# Altium PCB PCB1.PcbDoc
Units mil, origin at the board's own origin, x right, y up, seen from the top; angles counter-clockwise.
Board outline 6000 x 3345 mil, 4 copper layers (Top Layer, Ground, Power, Bottom Layer), stack 37.712 mil thick; 73 components, 69 nets, 250 pads, 116 vias.
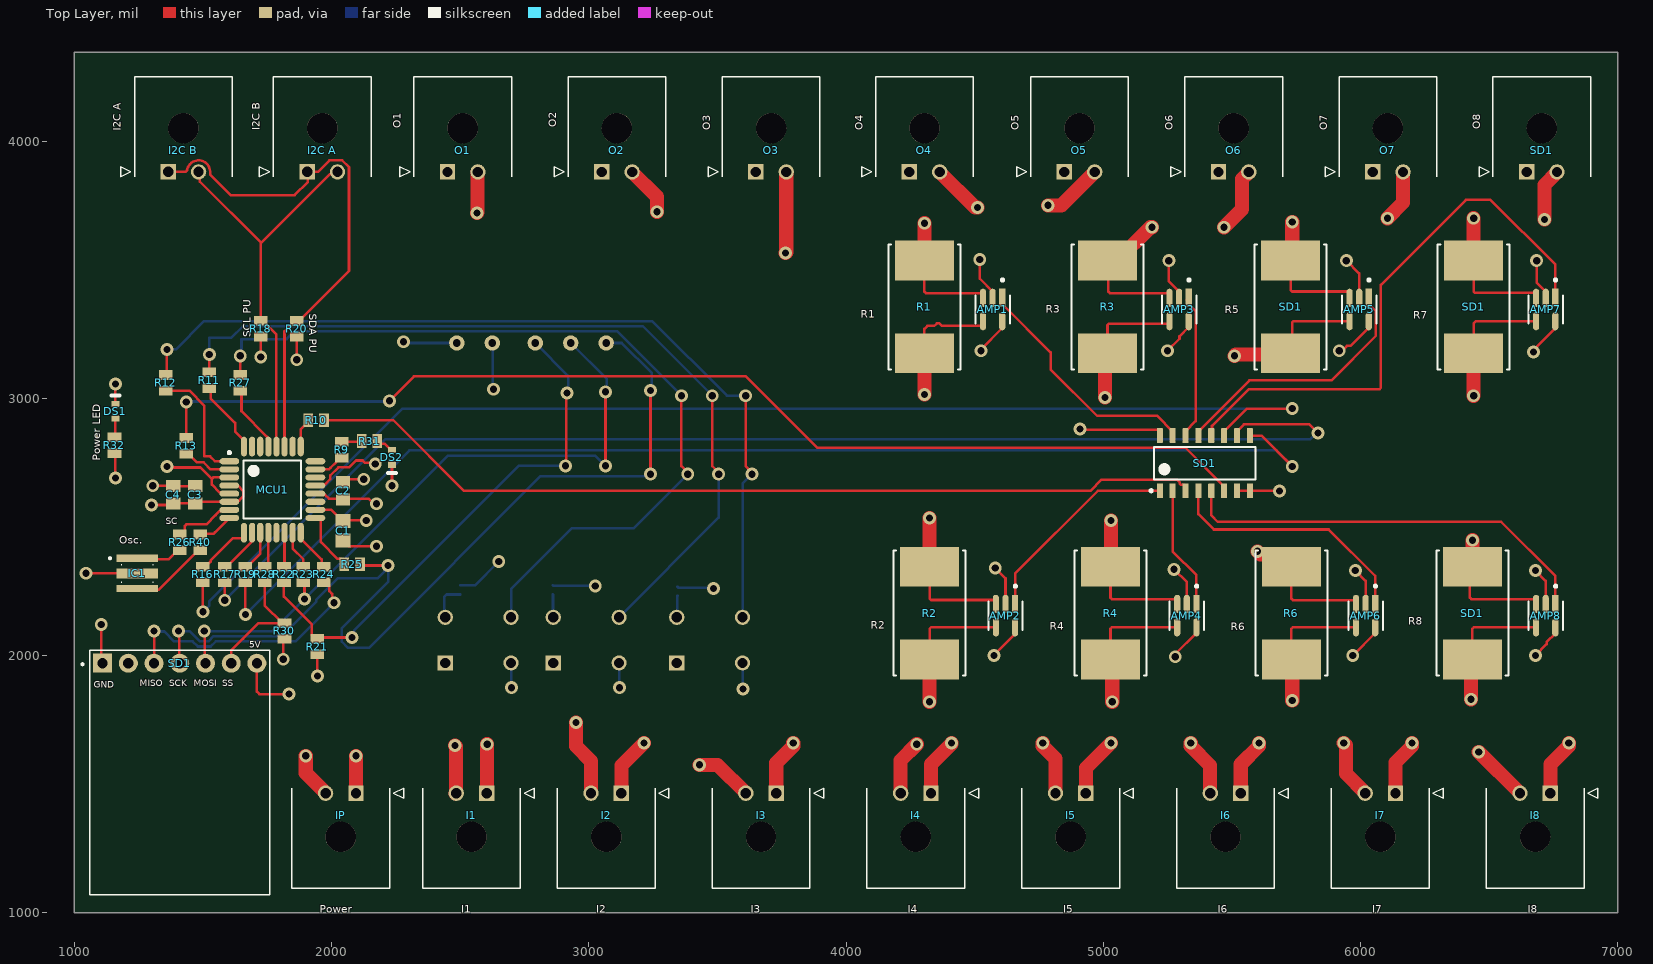
[diagram p0: Top Layer view]
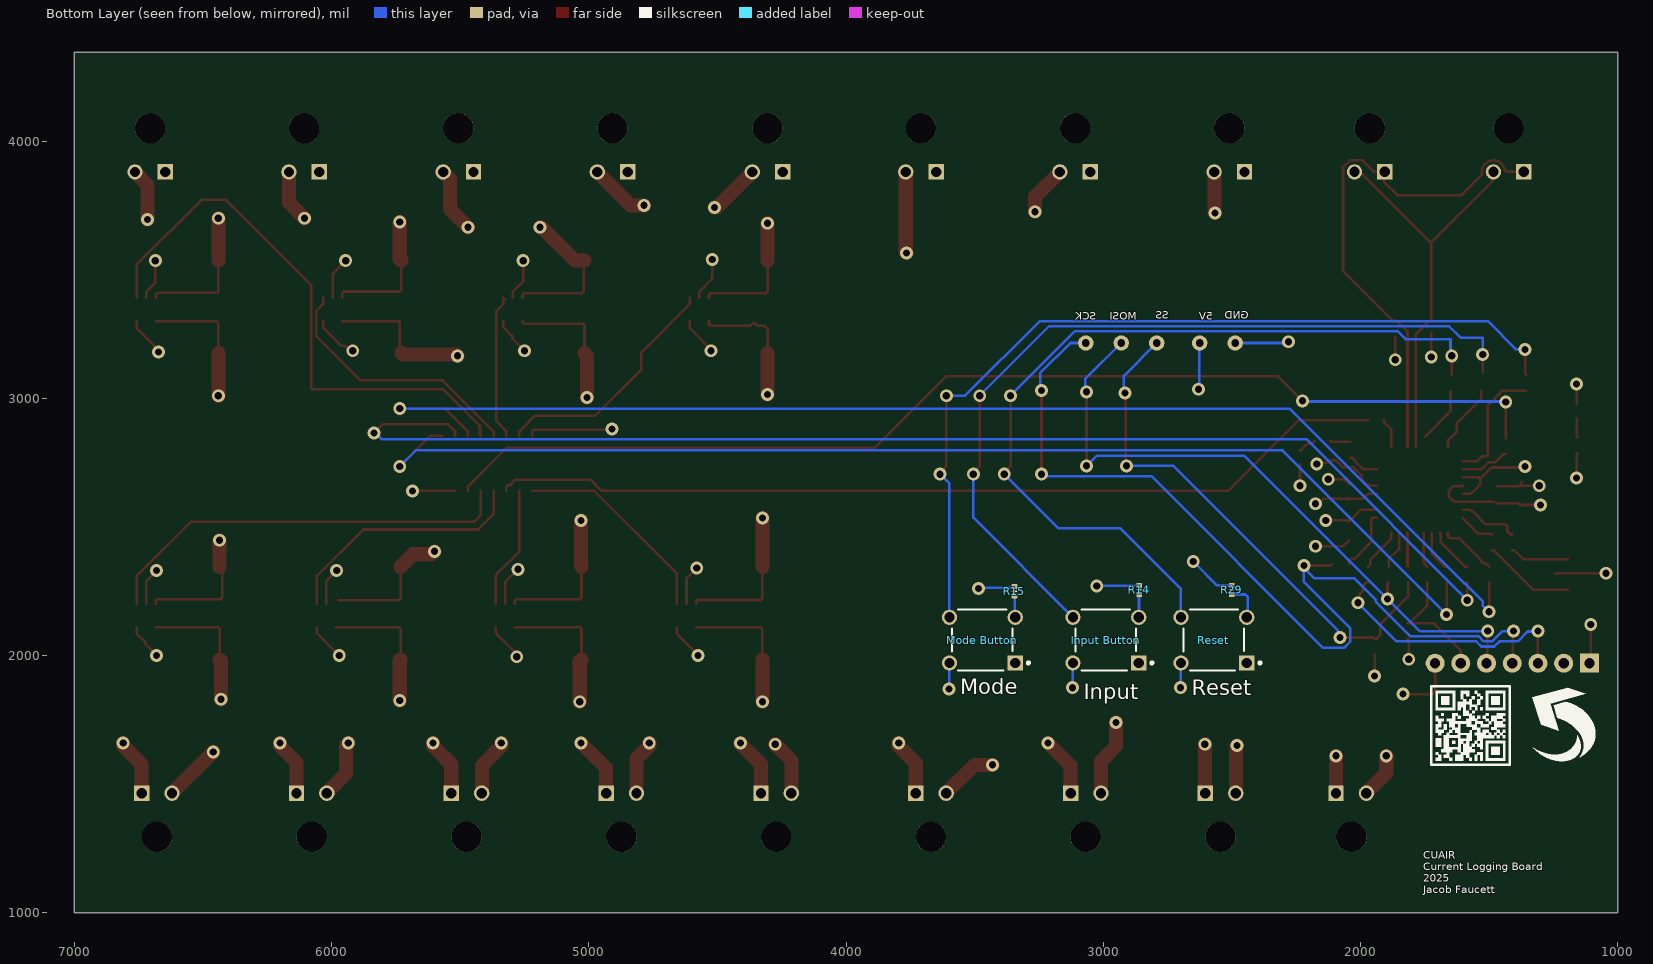
[diagram p1: Bottom Layer view, seen from below]
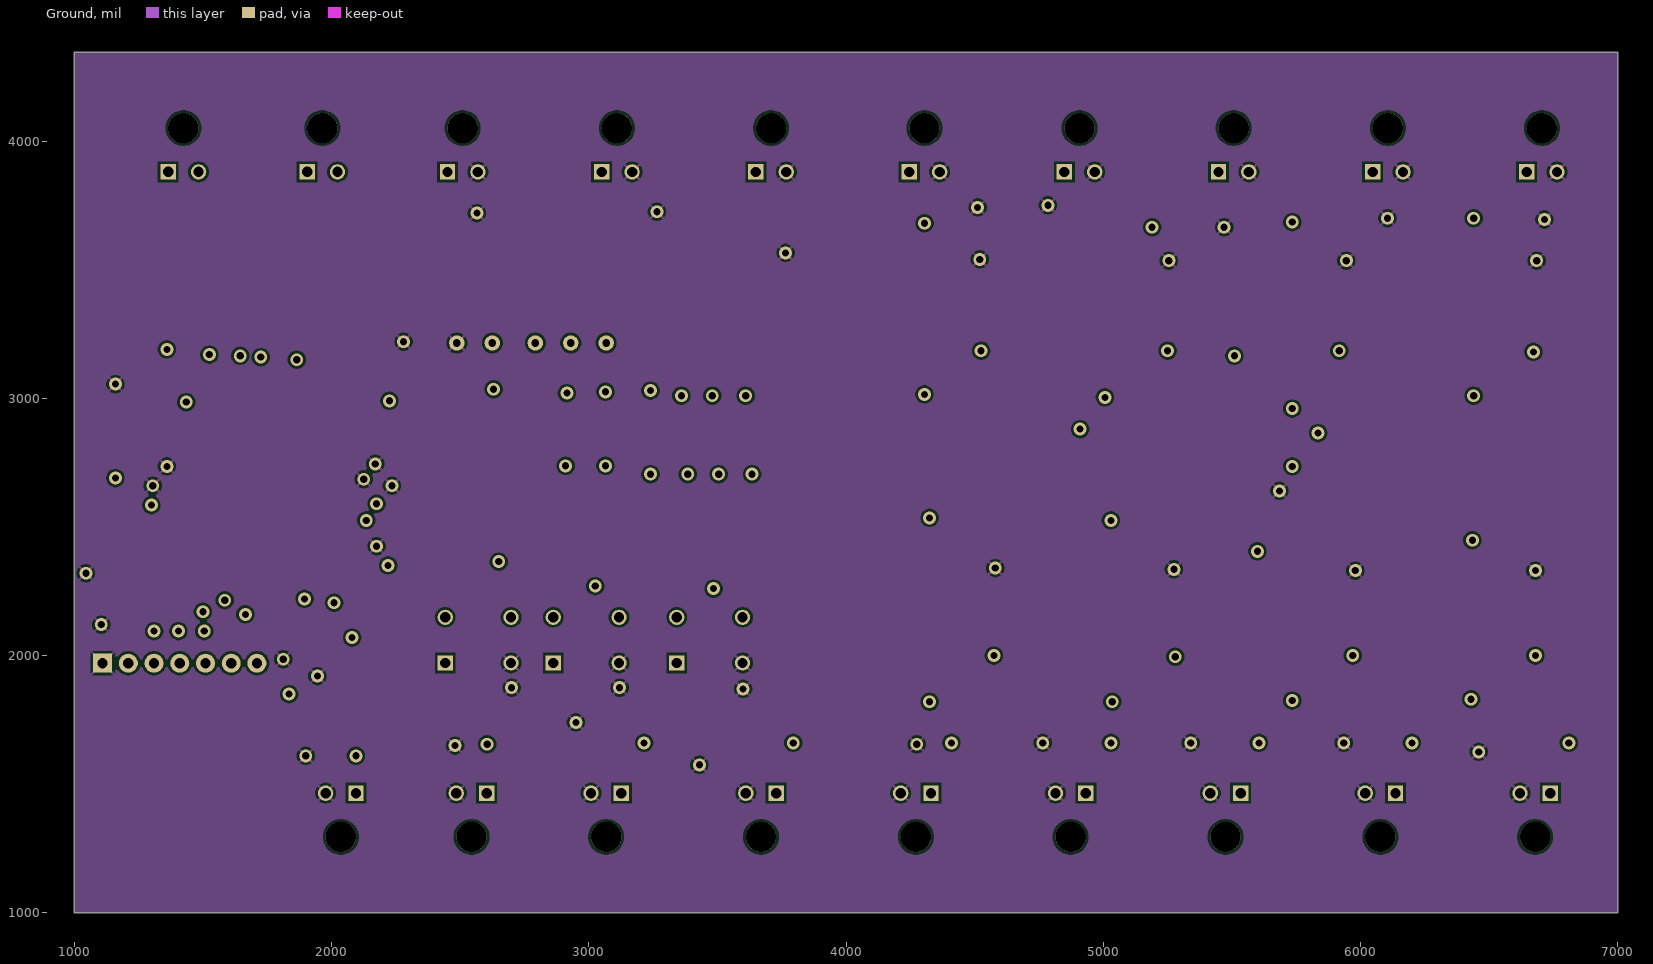
[diagram p2: Ground]
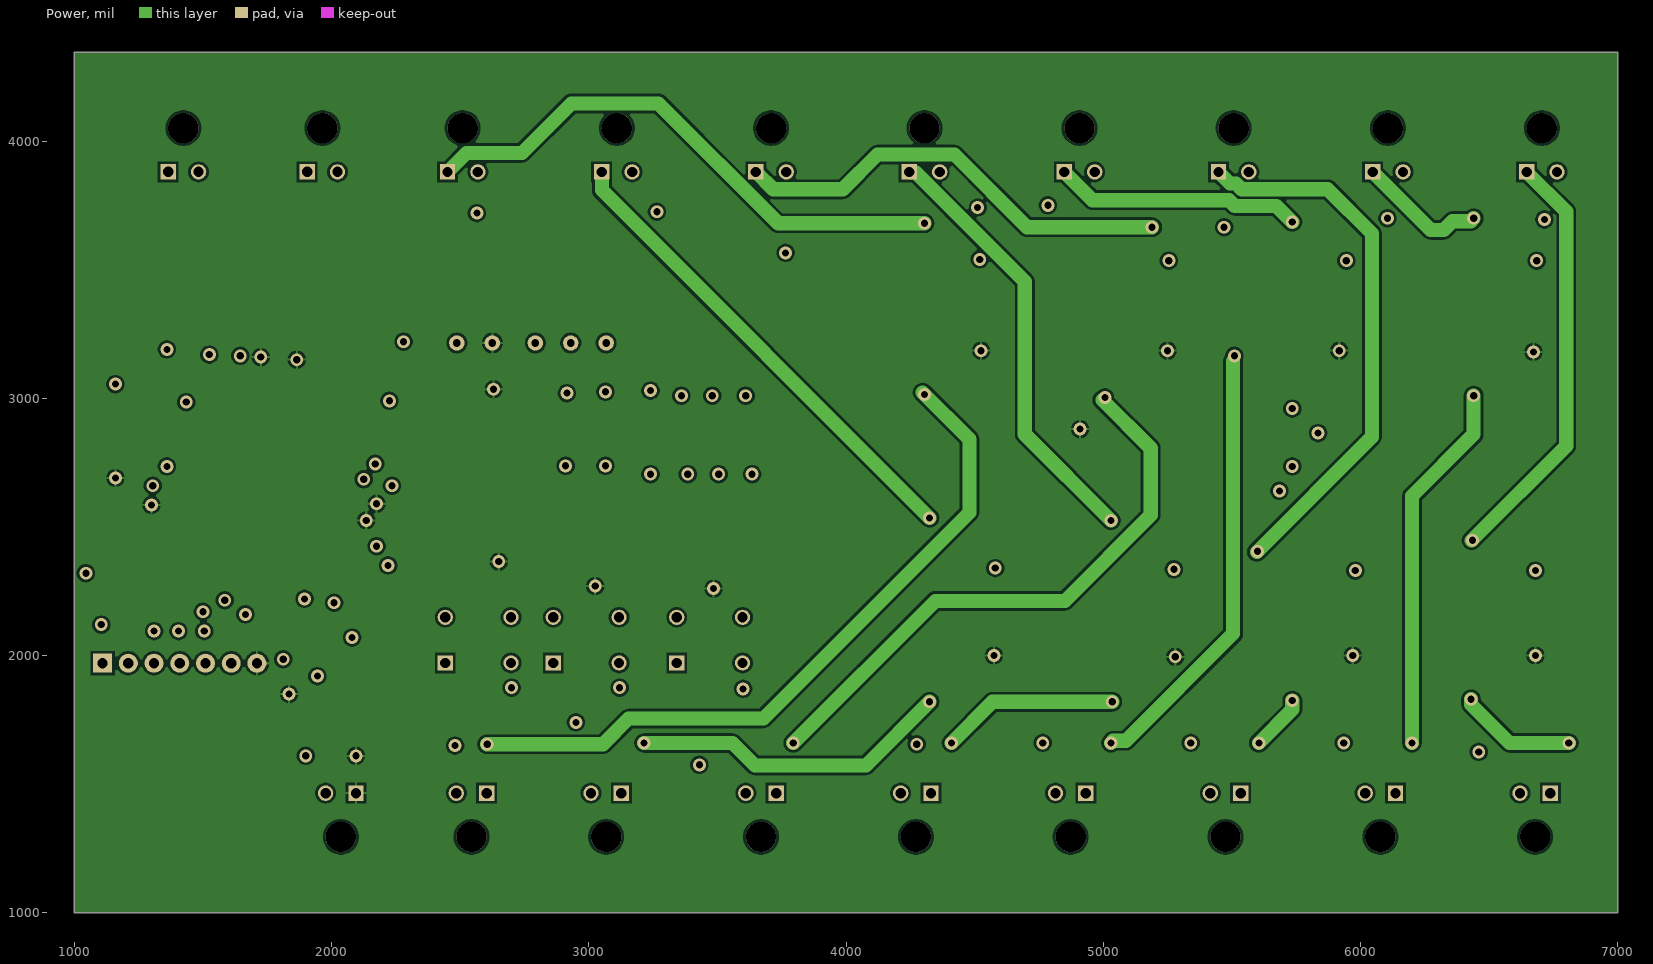
[diagram p3: Power]
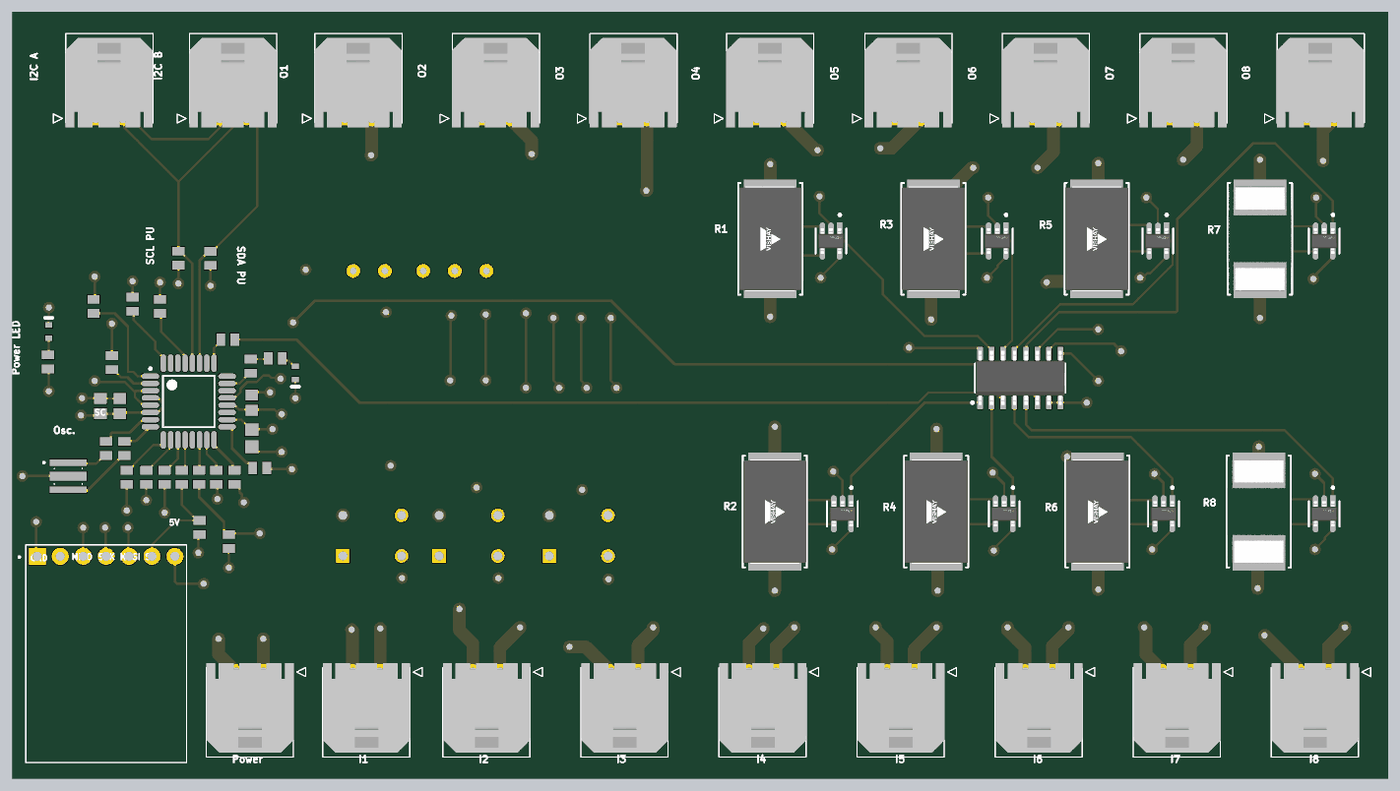
[diagram p4: 3D render of the assembled board from above, using the file's embedded part models]
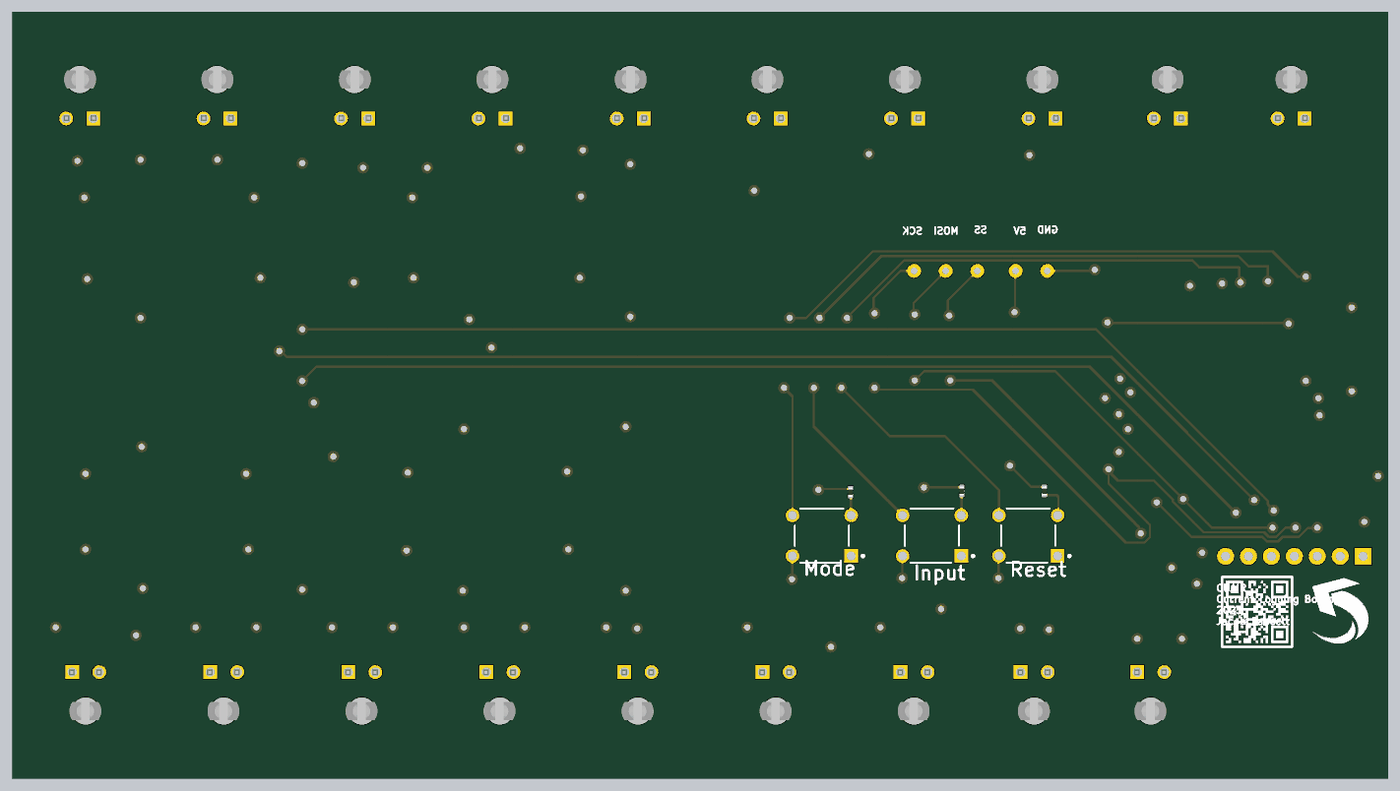
[diagram p5: 3D render of the assembled board from below, using the file's embedded part models]

## Layer stack, top to bottom
Top Solder: solder mask 0.4, Solder Resist, Dk 3.5
Top Layer: signal copper 1.4
Dielectric 6: prepreg 2.8, PP-006, Dk 4.1
Ground: signal copper 2.7559
Dielectric 2: prepreg 2.8, PP-006, Dk 4.1
Dielectric 3: prepreg 2.8, PP-006, Dk 4.1
Dielectric 1: dielectric 12.6, FR-4, Dk 4.8
Dielectric 4: prepreg 2.8, PP-006, Dk 4.1
Dielectric 5: prepreg 2.8, PP-006, Dk 4.1
Power: signal copper 2.7559
Dielectric 7: prepreg 2.8, PP-006, Dk 4.1
Bottom Layer: signal copper 1.4
Bottom Solder: solder mask 0.4, Solder Resist, Dk 3.5

## Board outline
1000,1000 7000,1000 7000,4345 1000,4345

## Design rules (kind name [scope] priority, off if disabled: settings)
Clearance [All] p1: gap=10 ignorepadtopadclearanceinfootprint=FALSE except(5: SMDPad-SMDPad THPad-THPad)
HoleSize [All] p1: absolutevalues=TRUE maxlimit=200 minlimit=1 maxpercent=80.000 minpercent=20.000
MatchedLengths OP8_Match [InxSignalClass('All xSignals')] p1: tolerance=1000 checknetsindiffpair=FALSE checkdiffpairvsdiffpair=TRUE checkxsignals=TRUE checkothers=TRUE targetsourcename=OP8_xSignal
MatchedLengths OP7_Match [InxSignalClass('All xSignals')] p2: tolerance=1000 checknetsindiffpair=FALSE checkdiffpairvsdiffpair=TRUE checkxsignals=TRUE checkothers=TRUE targetsourcename=OP7_xSignal
MatchedLengths OP6_Match [InxSignalClass('All xSignals')] p3: tolerance=1000 checknetsindiffpair=FALSE checkdiffpairvsdiffpair=TRUE checkxsignals=TRUE checkothers=TRUE targetsourcename=OP6_xSignal
MatchedLengths OP5_Match [InxSignalClass('All xSignals')] p4: tolerance=1000 checknetsindiffpair=FALSE checkdiffpairvsdiffpair=TRUE checkxsignals=TRUE checkothers=TRUE targetsourcename=OP5_xSignal
MatchedLengths OP4_Match [InxSignalClass('All xSignals')] p5: tolerance=1000 checknetsindiffpair=FALSE checkdiffpairvsdiffpair=TRUE checkxsignals=TRUE checkothers=TRUE targetsourcename=OP4_xSignal
MatchedLengths OP3_Match [InxSignalClass('All xSignals')] p6: tolerance=1000 checknetsindiffpair=FALSE checkdiffpairvsdiffpair=TRUE checkxsignals=TRUE checkothers=TRUE targetsourcename=OP3_xSignal
MatchedLengths OP2_Match [InxSignalClass('All xSignals')] p7: tolerance=1000 checknetsindiffpair=FALSE checkdiffpairvsdiffpair=TRUE checkxsignals=TRUE checkothers=TRUE targetsourcename=OP2_xSignal
MatchedLengths OP1_Match [InxSignalClass('All xSignals')] p8: tolerance=1000 checknetsindiffpair=FALSE checkdiffpairvsdiffpair=TRUE checkxsignals=TRUE checkothers=TRUE targetsourcename=OP1_xSignal
MinimumSolderMaskSliver [All] p1: minsoldermaskwidth=5
PolygonConnect PowerPolygonConnect [InNetClass('Power Class')] p1: connectstyle=Relief reliefconductorwidth=10 reliefentries=4 polygonreliefangle="90 Angle" airgapwidth=10
PolygonConnect GroundPolygonConnect [InNetClass('Ground Class')] p2: connectstyle=Relief reliefconductorwidth=10 reliefentries=4 polygonreliefangle="45 Angle" airgapwidth=10
PolygonConnect [All] p3: connectstyle=Relief reliefconductorwidth=10 reliefentries=4 polygonreliefangle="90 Angle" airgapwidth=10
RoutingVias [All] p1: holewidth=28 width=50 viastyle="Through Hole" minholewidth=28 minwidth=50 maxholewidth=28 maxwidth=50
SilkToSolderMaskClearance sliver [IsPad] p1: minsilkscreentomaskgap=4 clearancetoexposedcopper=TRUE
SolderMaskExpansion [All] p1: expansion=4 istentingtop=FALSE
SupplyNets "Schematic Supply Nets_4" [InNet('GND')] p1: voltage=0.000
SupplyNets "Schematic Supply Nets_3" [InNet('+5V')] p2: voltage=0.000
SupplyNets "Schematic Supply Nets_2" [InNet('+5')] p3: voltage=0.000
SupplyNets "Schematic Supply Nets_1" [InNet('AGND')] p4: voltage=0.000
SupplyNets "Schematic Supply Nets" [InNet('DGND')] p5: voltage=0.000
Width [All] p1: maxlimit=283 minlimit=10 preferedwidth=140 toplayer_maxwidth=140 toplayer_prefwidth=55 midlayer1_maxwidth=10 midlayer1_prefwidth=10 bottomlayer_maxwidth=140 bottomlayer_prefwidth=55 minimp=50.000000 maximp=50.000000 favimp=50.000000
27 further rules are at their usual default settings.

## Classes and differential pairs
net class "Power Class": +5 +5V
net class "Ground Class": AGND DGND GND
component class test_led: DS1 DS2 R8 R32
component class shunts_and_amplifiers: AMP1 AMP2 AMP3 AMP4 AMP5 AMP6 AMP7 AMP8 R1 R2 R3 R4 R6 SD1
component class SD: SD1
component class mux: SD1
component class mcu: C1 C2 C3 C4 IC1 MCU1 R9 R10 R11 R12 R13 R16 R17 R18 R19 R20 R21 R22 R23 R24 R25 R26 R27 R28 R30 R40
component class headers: I1 I2 "I2C A" "I2C B" I3 I4 I5 I6 I7 I8 IP O1 O2 O3 O4 O5 O6 O7 SD1
component class buttons: "Input Button" "Mode Button" R14 R15 R29 Reset

## Components (designator, comment, footprint, x,y, rotation, side; value= is the part's Value field where it differs from the comment)
AMP1 "INA180A1" FP-DBV0005A-IPC_A 4570,3345.16 r270 top
AMP2 "INA180A1" FP-DBV0005A-IPC_A 4620,2155.16 r270 top
AMP3 "INA180A1" FP-DBV0005A-IPC_A 5295,3345.16 r270 top
AMP4 "INA180A1" FP-DBV0005A-IPC_A 5325,2155.16 r270 top
AMP5 "INA180A1" FP-DBV0005A-IPC_A 5995,3345.16 r270 top
AMP6 "INA180A1" FP-DBV0005A-IPC_A 6020,2155.16 r270 top
AMP7 "INA180A1" FP-DBV0005A-IPC_A 6720,3345.16 r270 top
AMP8 "INA180A1" FP-DBV0005A-IPC_A 6720,2155.16 r270 top
C1 "100nf" CAPC2013X95X45ML10T25 2045,2485 r90 top
C2 "100nf" CAPC2013X95X45NL10T25 2045,2640 r270 top
C3 "100nf" CAPC2013X95X45NL10T25 1470,2625 r270 top
C4 "100nf" CAPC2013X95X45NL10T25 1385,2625 r270 top
DS1 "TLMS1100-GS08" VISH-TLMX1100_V 1160,2950 r90 top
DS2 "TLMS1100-GS08" VISH-TLMX1100_V 2235,2770 r270 top
I1 "43650-0201" 43650-02(00,01,02) 2603.11,1465 r0 top
I2 "43650-0201" 43650-02(00,01,02) 3126.87,1465 r0 top
"I2C A" "43650-0201" 43650-02(00,01,02) 1905,3880 r180 top
"I2C B" "43650-0201" 43650-02(00,01,02) 1365,3880 r180 top
I3 "43650-0201" 43650-02(00,01,02) 3728.75,1465 r0 top
I4 "43650-0201" 43650-02(00,01,02) 4330.62,1465 r0 top
I5 "43650-0201" 43650-02(00,01,02) 4932.49,1465 r0 top
I6 "43650-0201" 43650-02(00,01,02) 5534.36,1465 r0 top
I7 "43650-0201" 43650-02(00,01,02) 6136.24,1465 r0 top
I8 "43650-0201" 43650-02(00,01,02) 6738.11,1465 r0 top
IC1 "AWSCR-16.00CV-T" AWSCR1600CVT 1220.39,2319.06 r270 top
"Input Button" "B3F-1000" OMRON-B3F-1000-4_V 2990,2060 r0 bottom
IP "43650-0201" 43650-02(00,01,02) 2095,1465 r0 top
MCU1 "ATmega328P-AU" 32A_M 1770,2645 r0 top
"Mode Button" "B3F-1000" OMRON-B3F-1000-4_V 3470,2060 r0 bottom
O1 "43650-0201" 43650-02(00,01,02) 2450.94,3879.92 r180 top
O2 "43650-0201" 43650-02(00,01,02) 3050.37,3879.92 r180 top
O3 "43650-0201" 43650-02(00,01,02) 3649.79,3879.92 r180 top
O4 "43650-0201" 43650-02(00,01,02) 4245.94,3879.92 r180 top
O5 "43650-0201" 43650-02(00,01,02) 4848.63,3879.92 r180 top
O6 "43650-0201" 43650-02(00,01,02) 5448.05,3879.92 r180 top
O7 "43650-0201" 43650-02(00,01,02) 6047.47,3879.92 r180 top
R1 ".01 Ohm 4 Terminal" FP-WSR3-MFG 4305,3355 r90 top locked
R2 ".01 Ohm 4 Terminal" FP-WSR3-MFG 4325,2165 r90 top
R3 ".01 Ohm 4 Terminal" FP-WSR3-MFG 5016.67,3355 r90 top
R4 ".01 Ohm 4 Terminal" FP-WSR3-MFG 5028.33,2165 r90 top
R6 ".05 Ohm 4 Terminal" FP-WSR3-MFG 5731.67,2165 r90 top
R9 "0 (Empty Jumper)" 0805 2040,2800 r90 top value=0
R10 "0 (Empty Jumper)" 0805 1940,2915 r0 top value=0
R11 "0 (Empty Jumper)" 0805 1525,3070 r90 top value=0
R12 "0 (Empty Jumper)" 0805 1355,3060 r90 top value=0
R13 "0 (Empty Jumper)" 0805 1435,2815 r90 top value=0
R14 "Resistor 1K +/-5 % 0402 63 mW" RESC0402(1005)_L 2860,2255 r270 bottom value=1k
R15 "Resistor 1K +/-5 % 0402 63 mW" RESC0402(1005)_L 3345,2250 r270 bottom value=1k
R16 "0 (Empty Jumper)" 0805 1500,2315 r270 top value=0
R17 "0 (Empty Jumper)" 0805 1585,2315 r270 top value=0
R18 "10000 (10k)" 0805 1725,3270.51 r270 top value=10k
R19 "0 (Empty Jumper)" 0805 1665,2315 r270 top value=0
R20 "10000 (10k)" 0805 1865,3270 r270 top value=10k
R21 "10000 (10k)" 0805 1945,2035 r90 top value=10k
R22 "0 (Empty Jumper)" 0805 1815,2315 r270 top value=0
R23 "0 (Empty Jumper)" 0805 1890,2315 r270 top value=0
R24 "0 (Empty Jumper)" 0805 1970,2315 r270 top value=0
R25 "0 (Empty Jumper)" 0805 2080,2355 r0 top value=0
R26 "0 (Empty Jumper)" 0805 1410,2440 r270 top value=0
R27 "0 (Empty Jumper)" 0805 1645,3060 r90 top value=0
R28 "0 (Empty Jumper)" 0805 1740,2315 r270 top value=0
R29 "Resistor 1K +/-5 % 0402 63 mW" RESC0402(1005)_L 2500,2255 r270 bottom value=1k
R30 "10000 (10k)" 0805 1817.13,2095.51 r90 top value=10k
R31 "0 (Empty Jumper)" 0805 2147.61,2833.72 r180 top value=0 (schematic designator R9)
R32 "0 (Empty Jumper)" 0805 1156.28,2817.61 r270 top value=0 (schematic designator R9)
R40 "0 (Empty Jumper)" 0805 1490,2440 r90 top value=0
Reset "B3F-1000" OMRON-B3F-1000-4_V 2570,2060 r0 bottom
SD1 "DEV-13743" MODULE_DEV-13743 1410,1545 r180 top locked
SD1 ".1 Ohm 4 Terminal" FP-WSR-MFG 6435,2165 r90 top value=100mΩ (schematic designator R31)
SD1 ".1 Ohm 4 Terminal" FP-WSR-MFG 6440,3355 r90 top value=100mΩ (schematic designator R7)
SD1 ".01 Ohm 4 Terminal" FP-WSR3-MFG 5728.33,3355 r90 top (schematic designator R5)
SD1 "43650-0201" 43650-02(00,01,02) 6645.94,3879.92 r180 top (schematic designator O8)
SD1 "CD4051BM96" D0016A_N 5395,2747.72 r90 top (schematic designator MUX1)

## Footprints (in the part's own frame and the unit in brackets; to place one, negate y for a bottom-side part, rotate by r counter-clockwise, add the part's x,y. Pads: shape width x height; smd on the part's side, far side on the other; paste and mask are expansions set on the pad)
32A_M [mm] "Thin QFP, 32-Leads, Body 7x7mm, Pitch 0.8mm, IPC Low Density"
  oval 1.95x0.6 smd: 1(-4.25,2.8) 2(-4.25,2) 3(-4.25,1.2) 4(-4.25,0.4) 5(-4.25,-0.4) 6(-4.25,-1.2) 7(-4.25,-2) 8(-4.25,-2.8) 17(4.25,-2.8) 18(4.25,-2) 19(4.25,-1.2) 20(4.25,-0.4) 21(4.25,0.4) 22(4.25,1.2) 23(4.25,2) 24(4.25,2.8)
  oval 0.6x1.95 smd: 9(-2.8,-4.25) 10(-2,-4.25) 11(-1.2,-4.25) 12(-0.4,-4.25) 13(0.4,-4.25) 14(1.2,-4.25) 15(2,-4.25) 16(2.8,-4.25) 25(2.8,4.25) 26(2,4.25) 27(1.2,4.25) 28(0.4,4.25) 29(-0.4,4.25) 30(-1.2,4.25) 31(-2,4.25) 32(-2.8,4.25)
  silkscreen extent -4.37,-2.85 2.85,3.77, body extent -3.5,-3.5 3.5,3.5, height 1.2
0805 [mm] "Chip Resistor, 2-Leads, Body 2.00x1.25mm, IPC High Density"
  rect 0.95x1.35 smd: 1(-0.775,0) 2(0.775,0)
  body extent -1.1,-0.72 1.1,0.72, height 0.7
43650-02(00,01,02) [mm]
  rect 1.52x1.52 hole 1.02: 1(0,0)
  round 1.52 hole 1.02: 2(-3,0)
  round 3 hole 3 unplated: 3(-1.5,-4.32)
  silkscreen extent -6.32,-9.41 4.7,0.5, body extent -6.28,-8.93 3.36,0.97, height 5.54
AWSCR1600CVT [mm]
  rect 0.7x4.1 smd: 1(-1.5,0.625) 3(1.5,0.625)
  rect 1x4.1 smd: 2(0,0.625)
  silkscreen extent -1.6,-2.17 0.9,2.17
CAPC2013X95X45ML10T25 [mm] "Chip Capacitor, 2-Leads, Body 2.00x1.25mm, IPC Low Density"
  rect 1.4x1.5 smd: 1(-0.95,0) 2(0.95,0)
  body extent -1.05,-0.67 1.05,0.67, height 0.95
CAPC2013X95X45NL10T25 [mm] "Chip Capacitor, 2-Leads, Body 2.00x1.25mm, IPC Medium Density"
  rect 1.2x1.4 smd: 1(-0.85,0) 2(0.85,0)
  body extent -1.05,-0.67 1.05,0.67, height 0.95
D0016A_N [mm] "SOIC, 16-Leads, Body 10x4mm, Pitch 1.27mm, IPC Medium Density"
  rrect17% 1.45x0.6 smd: 1(-2.725,4.445) 2(-2.725,3.175) 3(-2.725,1.905) 4(-2.725,0.635) 5(-2.725,-0.635) 6(-2.725,-1.905) 7(-2.725,-3.175) 8(-2.725,-4.445) 9(2.725,-4.445) 10(2.725,-3.175) 11(2.725,-1.905) 12(2.725,-0.635) 13(2.725,0.635) 14(2.725,1.905) 15(2.725,3.175) 16(2.725,4.445)
  silkscreen extent -2.85,-5 1.6,5.42, body extent -3,-4.95 3,4.95, height 1.59
FP-DBV0005A-IPC_A [mm]
  rect 1.805x0.612 smd paste+0 mask+0: 1(-1.15,0.95)
  rrect100% 1.805x0.612 smd paste+0 mask+0: 2(-1.15,0) 3(-1.15,-0.95) 4(1.15,-0.95) 5(1.15,0.95)
  silkscreen extent -3.03,-1.7 1.4,1.7, body extent -2.55,-1.95 2.55,1.95, height 0.25
FP-WSR3-MFG [mm]
  rect 3.94x5.84 smd paste+0 mask+0: 1(-4.575,0) 2(4.575,0)
  silkscreen extent -6.19,-3.55 6.19,3.55, body extent -6.65,-3.65 6.65,3.65, height 0.25
FP-WSR-MFG [mm]
  rect 3.94x5.84 smd paste+0 mask+0: 1(-4.575,0) 2(4.575,0)
  silkscreen extent -6.19,-3.55 6.19,3.55, body extent -6.65,-3.65 6.65,3.65, height 0.25
MODULE_DEV-13743 [mil]
  rect 74x74 hole 40: 1(300,-425)
  round 74 hole 40: 2(200,-425) 3(100,-425) 4(0,-425) 5(-100,-425) 6(-200,-425) 7(-300,-425)
  silkscreen extent -350,-475 382,475
OMRON-B3F-1000-4_V [mm] "TH, 4-Leads, Body 6x6mm"
  rect 1.5x1.5 hole 1 paste-2539.97: 1(-3.25,2.25)
  round 1.5 hole 1 paste-2539.97: 2(3.25,2.25) 4(3.25,-2.25)
  round 1.5 hole 1 paste-2539.97 mask+0.102: 3(-3.25,-2.25)
  silkscreen extent -4.67,-3 3,3, body extent -3.4,-3 3.4,3, height 4.5
RESC0402(1005)_L [mm] "Chip Resistor, Body 1.0x0.5mm, IPC High Density"
  rrect25% 0.5x0.55 smd: 1(-0.45,0) 2(0.45,0)
  silkscreen extent 0,-0.2 0,0.2, body extent -0.5,-0.25 0.5,0.25, height 0.3
VISH-TLMX1100_V [mm] "SMD, 2-Leads, Body 1.6x0.8mm"
  rect 0.6x0.8 smd: 1(-0.725,0) 2(0.725,0)
  silkscreen extent 1.53,-0.4 1.53,0.4, body extent -0.8,-0.4 0.8,0.4, height 0.65

## Part data
AMP1 AMP2 AMP3 AMP4 AMP5 AMP6 AMP7 AMP8: library part CMP-04895-000140-1, "IC CURR SENSE 1 CIRCUIT SOT23-5", Case/Package=SOT-23-5, Input Bias Current=100nA, Input Offset Voltage (Vos)=100uV, Max Operating Temperature=125°C, Min Operating Temperature=-40°C, Operating Supply Current=260uA, -3db Bandwidth=350kHz, Mount="Surface Mount", Number of Circuits=1, Packaging="Tape and Reel", Slew Rate=2V/µs
C1 C2 C3 C4: library part CMP-1036-04169-2, Manufacturer=Murata, Part Number=GRM219R71H333KA01D
DS1 DS2: library part CMP-007-00030-2, "Red Led, 20mA, 2.1 V, -40 to 100 degC, 2-Pin SMD (0603), RoHS, Tape and Reel", Case/Package=0603, Colour=Red, Forward Current=20mA, Forward Voltage=2.1V, Manufacturer="Vishay Semiconductor", Max Operating Temperature=100°C, Min Operating Temperature=-40°C, Package Description="2-Pin Surface Mount Device, Body 1.6 x 0.8 mm", Package Quantity=3000, Package Reference=TLMX1100, Power=90mW, Datasheet URL=http://www.vishay.com/docs/83173/tlmb1100.pdf, Datasheet Version="Rev. 2.7, 03/2016", Illumination Colour=Red, Lens Style=Clear, Luminous Intensity=63mcd, Manufacturer URL=http://www.vishay.com/, Mounting Technology=SM, Nominal Vf=2.1V, Packaging=TapeandReel, Pins=2, RoHS Compliant=True, Viewing Angle=160degrees
I1 I2 "I2C A" "I2C B" I3 I4 I5 I6 I7 I8 IP O1 O2 O3 O4 O5 O6 O7 SD1: library part CMP-002-00072-2, "Connector", Manufacturer_Name=Molex, Mouser Part Number=538-43650-0201, Datasheet Link=https://www.molex.com/pdm_docs/sd/436500200_sd.pdf, Design Item ID=43650-0201, Height=5.57mm, Manufacturer_Part_Number=43650-0201, Mouser Price/Stock=https://www.mouser.co.uk/ProductDetail/Molex/43650-0201?qs=HlEFOAM0q6XDqOKWr68Eiw%3D%3D, Source="1x2 Right Angle Molex Microfit.SchLib"
IC1: library part CMP-031-00009-1, "Industrial Grade Ceramic Resonator 16MHz", Manufacturer_Name=ABRACON, Arrow Part Number=AWSCR-16.00CV-T, Arrow Price/Stock=https://www.arrow.com/en/products/awscr-16.00cv-t/abracon?region=nac, Datasheet Link=https://abracon.com/Resonators/AWSCR_CV.pdf, Design Item ID=AWSCR-16.00CV-T, Height=1mm, Manufacturer_Part_Number=AWSCR-16.00CV-T, MPN=AWSCR-16.00CV-T, Source=SamacSys.SchLib
"Input Button" "Mode Button" Reset: library part CMP-011-00004-2, "Tactile Switch, SPST-NO, 0.05 A, 24 V, -25 to 70 degC, 4-Pin THD, RoHS, Bulk", Contact Current Rating=50mA, Manufacturer="Omron Electronic Components", Max Contact Resistance=100mohm, Max Operating Temperature=70°C, Max Voltage Rating (DC)=24V, Min Operating Temperature=-25°C, Operating Force=100gf, Package Description="4-Pin Through Hole Device, Body 6 x 6 mm", Package Quantity=1500, Resistance=0.1Ohm, Case/Package=B3F-1000, Contact Material=Gold, Contact Plating=Gold, Current Rating=50mA, Datasheet URL=http://www.omron.com/ecb/products/pdf/en-b3f.pdf, Datasheet Version=Jan-15, Manufacturer URL=http://www.omron.com/, Max Current Rating=50mA, Mounting Technology=TH, Package Reference=B3F-1000, Packaging=Bulk, Pins=4, RoHS Compliant=True, Throw Configuration=SPST, Voltage Rating=24V, Voltage Rating (DC)=24V
MCU1: library part CMP-0095-00269-2, "8-bit AVR Microcontroller, 32KB Flash, 1KB EEPROM, 2KB SRAM, 32-pin TQFP, Industrial Grade (-40°C to 85°C)", Code_JEDEC=MS-026-ABA, ComponentLink1Description="Manufacturer URL", ComponentLink1URL=http://www.atmel.com/, ComponentLink2Description="ATmega48A/48PA/88A/88PA/168A/168PA/328/328P Datasheet", ComponentLink2URL=http://www.atmel.com/dyn/resources/prod_documents/doc8271.pdf, ComponentLink3Description="ATmega48A/48PA/88A/88PA/168A/168PA/328/328P Summary", ComponentLink3URL=http://www.atmel.com/dyn/resources/prod_documents/8271S.pdf, DatasheetVersion="revD, May-2011", PackageDescription="32-Lead, 7x7x1.0 mm Body, 0.8mm Lead Pitch, Thin Profile Plastic Quad Flat Package (TQFP)", PackageReference=32A, PackageVersion="revC, Oct-2010", RevisionNote="DatasheetVersion & PackageVersion updated. URLs added."
R1 R2 R3 R4 R6 SD1: library part CMP-00030-39814339-1, "WSR3R0500FEA Res Metal Strip 4527 0.05 Ohm 1% 3W ±75ppm/°C Molded SMD SMD Embossed Plastic T/R", Case Code (Imperial)=4527, Max Operating Temperature=275°C, Min Operating Temperature=-65°C, Power Rating=3W, Resistance=50mΩ, Temperature Coefficient=75ppm/°C, Tolerance=1%, Voltage Rating=380mV, Case/Package=4527, Composition="Metal Strip", Contact Plating="Silver, Tin", Depth=6.98mm, Height=2.41mm, Lead Free="Lead Free", Length=11.56mm, Military Standard=Not, Mount="Surface Mount", NexarPartId=39814339, Packaging="Cut Tape", Radiation Hardening=No, REACH SVHC="No SVHC", RoHS=Compliant, Schedule B="8533210045, 8533210045", Termination=SMD/SMT, Voltage Rating (DC)=380mV, Width=6.98mm
R9 R10 R11 R12 R13 R16 R17 R19 R22 R23 R24 R25 R26 R27 R28 R31 R32 R40: library part CMP-009-00239-1, "RES Thick Film, 0Ω, 0.125W, 150V, 0805", ComponentLink1Description=Source, ComponentLink1URL=https://www.mouser.com/ProductDetail/Panasonic/ERJ-6GEY0R00V?qs=tQNqqtTOejLLHbaWAzeH1w%3D%3D, Design Item ID="0 (Empty Jumper)", DNI=DNI, DNP=DNP, Source="JLCPCB Resistor Schematic Lib.SchLib"
R14 R15 R29: library part CMP-009-00157-3, "Chip Resistor, 1 kOhms, +/-5 %, 63 mW, -55 to 155 degC, 0402", Case/Package=0402, Max Operating Temperature=155°C, Min Operating Temperature=-55°C, Power=63mW, Tolerance=5%, Pins=2
R18 R20 R21 R30: library part CMP-009-00203-1, "RES Thick Film, 10kΩ, 0.125W, 150V, 0805", JLCPCB Basic Part=TRUE, JLCPCB Part #=C17414, Manufacturer=UNI-ROYAL, MPN=0805W8F1002T5E, Power Rating=125mW, Voltage Rating=150V, ComponentLink1Description=Source, ComponentLink1URL=https://jlcpcb.com/partdetail/18102-0805W8F1002T5E/C17414, Design Item ID="10000 (10k)", Source="JLCPCB Resistor Schematic Lib.SchLib"
SD1: "SPARKFUN LEVEL SHIFTING MICROSD", Package=None, Availability=Unavailable, MF="SparkFun Electronics", MP=DEV-13743, Price=None, SnapEDA_Link=https://www.snapeda.com/parts/DEV-13743/SparkFun%20Electronics/view-part/567676/?ref=snap
SD1 SD1: library part CMP-02407-000027-1, "RES 0.1 OHM 1% 3W 4527 / WSR3R1000FEK", Manufacturer=Vishay, Manufacturer Part Number=WSR3R1000FEK, Package=WSR, Power Rating=3W, Resistance=100mΩ, Temperature="-65°C to +275°C", Temperature Coefficient=75ppm/°C, Temperature Range High=+275°C, Temperature Range Low=-65°C, Tolerance=1%, Automotive=Yes, Automotive Grade="Grade 0", Category=Res, ComponentLink2Description=Datasheet, ComponentLink2URL=http://www.vishay.com/docs/30101/wsr.pdf, Composition="Metal Strip", Device Class L1="Passive Components", Device Class L2=Resistors, Device Class L3="Chip SMD Resistors", Digikey Description="RES 0.1 OHM 1% 3W 4527", Height=2.537mm, Lead Free=Yes, Mouser Description="Res Metal Strip 4527 0.1 Ohm 1% 3W ±75ppm/C Sulfur Resistant Molded J-Lead SMD Automotive Bulk", Octopart=https://octopart.com/wsr3r1000fek-vishay-39709091, RoHS=TRUE, Series=WSR
SD1: library part CMP-1575-00045-4, "CMOS Single 8-Channel Analog Multiplexer/Demultiplexer with Logic-Level Conversion, D0016A, LARGE T&R", Generic Part Number=CD4051B, Manufacturer="Texas Instruments", Operating Temperature Range(C)="-55 to 125", Rating=Military, Bandwidth(Max)(MHz)=20, Code_JEDEC="MS-012 variation AC", Configuration="1 X 1：8 MUX", Crosstalk=Yes, DatasheetVersion=SCHS047G, ICC(Typ)(mA)=0.00008, Output Drive (IOL/IOH)(Max)(mA)=1, Output Type=CMOS, PackageReference=D0016A, PackageVersion=http://www.ti.com/lit/ml/mpds178g/mpds178g.pdf, Ron(Max)(Ohms)=240, Ron(Typ)(Ohms)=125, VCC(Max)(V)=18, VCC(Min)(V)=5

## Free pads (board coordinates)
  round 60 hole 30: 2(2487.2,3215) 3(2625,3215) 4(2792.2,3215) 5(2930,3215) 6(3067.8,3215)

## Via types
v1: diameter 50, hole 28, Top Layer to Bottom Layer, tented both sides, 116 vias

## Nets (pads, with @x,y where several pads share a name; then routed paths per layer and width w, separated by ;. In a path a pad name is that pad's centre, name@x,y a point inside that pad or via, vN(x,y) a via of type N, cw(c..) or ccw(c..) an arc to the next point about the centre after c; other vN are vias at no path point)
+5: 
+5V: AMP1.5 AMP2.5 AMP3.5 AMP4.5 AMP5.5 AMP6.5 AMP7.5 AMP8.5 C1.2 C2.2 C3.2 C4.2 IP.1 MCU1.4 MCU1.6 MCU1.18 MCU1.20 pad.3 R14.1 R15.1 R18.2 R20.2 R29.1 R32.2 SD1.7@1710,1970 SD1.16 | length 3800.7
  Top Layer w10: R32.2 1160,2783.38 v1(1160,2690) ; v1(1300,2585) 1378.46,2585 C4.2 C3.2 C3.2@1471.22,2592.76 ; C3.2@1481.22,2597.76 MCU1.6 1632.94,2597.76 1637.62,2602.44 1640.36,2602.44 1656.06,2618.15 1656.06,2640.36 1638.28,2658.14 1605.28,2658.14 MCU1.4 MCU1.4@1602.14,2661.28 ; SD1.7@1710,1970 1710,1860 1720,1850 v1(1835,1850) ; v1(1725,3160) R18.2@1725,3253.35 ; v1(1865,3150) R20.2 ; MCU1.18 1999.17,2566.26 2043.03,2522.4 C1.2 2047.6,2525 v1(2135,2525) ; MCU1.20 1967.58,2629.25 1972.27,2624.57 1975,2624.57 1989.57,2610 C2.2@2043.93,2610 ; C2.2 2048.46,2610 2144.18,2610 2164.18,2590 v1(2175,2590) ; v1(4525,3185) 4525,3190.16 4607.4,3272.56 AMP1.5 ; v1(4575,2000) 4575,2001.99 4657.4,2084.39 AMP2.5 ; v1(4910,2880) 4911.73,2878.27 5213.19,2878.27 5220,2871.46 SD1.16 ; v1(5250,3185) 5296.38,3231.38 5296.38,3240.36 5332.4,3276.38 AMP3.5 ; v1(5280,1995) 5280,2005 5362.4,2087.4 AMP4.5 ; v1(5917.5,3185) 5928.32,3185 5947.39,3204.06 5962.08,3204.06 6032.4,3274.39 AMP5.5 ; v1(5970,2000) 5970.51,2000 6057.4,2086.89 AMP6.5 ; v1(6672.5,3180.01) 6672.5,3187.66 6757.4,3272.56 AMP7.5 ; v1(6680,2000) 6723.88,2043.88 6723.88,2052.86 6757.4,2086.38 AMP8.5
  Top Layer w55: IP.1 v1(2095,1610)
  Bottom Layer w10: R29.1 2557.72,2272.72 v1(2650,2365) ; pad.3 2627.5,3212.5 2627.5,3037.5 v1(2630,3035) ; R14.1 2861.36,2271.36 3023.64,2271.36 v1(3025,2270) ; R15.1 3348.86,2263.86 3481.14,2263.86 v1(3485,2260)
AGND: 
AMP_1: AMP1.1 SD1.15 | length 946.7
  Top Layer w10: AMP1.1 4607.4,3366.97 4795.61,3178.76 4795.61,3112.57 4976.77,2931.41 5210.32,2931.41 5270,2871.73 SD1.15
AMP_2: AMP2.1 SD1.1@5220,2640.43 | length 814.4
  Top Layer w10: AMP2.1 4657.4,2319.17 4978.67,2640.43 SD1.1@5220,2640.43
AMP_3: AMP3.1 SD1.14 | length 573
  Top Layer w10: SD1.14 5320,2871.73 5359.45,2911.18 5359.45,3339.92 5332.4,3366.97 AMP3.1 AMP3.1@5325.35,3383.4
AMP_4: AMP4.1 SD1.2@5270,2640.43 | length 478.3
  Top Layer w10: SD1.2@5270,2640.43 5270,2405 5362.4,2312.6 AMP4.1
AMP_5: AMP5.1 SD1.13 | length 1018.8
  Top Layer w10: SD1.13 5370,2871.73 5568.27,3070 5886.82,3070 6059.45,3242.63 6059.45,3339.92 6032.4,3366.97 AMP5.1
AMP_6: AMP6.1 SD1.4@5370,2640.43 | length 986.3
  Top Layer w10: SD1.4@5370,2640.43 5370,2550 5430,2490 5876.57,2490 6057.4,2309.17 AMP6.1
AMP_7: AMP7.1 SD1.12 | length 2205.3
  Top Layer w10: SD1.12 5422.69,2857.69 5422.69,2892.69 5565,3035 6073.59,3035 6079.45,3040.86 6079.45,3440.95 6410.18,3771.68 6504.89,3771.68 6757.4,3519.17 AMP7.1
AMP_8: AMP8.1 SD1.5@5420,2640.43 | length 1639.2
  Top Layer w10: SD1.5@5420,2640.43 5420,2545 5445,2520 6546.57,2520 6757.4,2309.17 AMP8.1
CHAN_SEL_A: R16.2 SD1.11 | length 5004.7
  Top Layer w10: v1(1500,2170) R16.2 ; SD1.11 5470,2871.73 5558.27,2960 v1(5735,2960)
  Bottom Layer w10: v1(1500,2170) 1525,2195 1525,2211.57 1593.43,2280 1595,2280 2275,2960 v1(5735,2960)
CHAN_SEL_B: R17.2 SD1.10 | length 4946.4
  Top Layer w10: v1(1585,2215) R17.2 ; SD1.10 5520,2871.73 5546.81,2898.54 5801.46,2898.54 v1(5835,2865)
  Bottom Layer w10: v1(1585,2215) 1875.75,2505.75 1875.75,2507.32 2208.43,2840 5803.43,2840 5828.43,2865 v1(5835,2865)
CHAN_SEL_C: R19.2 SD1.9 | length 4699
  Top Layer w10: v1(1665,2160) R19.2 ; SD1.9 5615,2855 v1(5735,2735)
  Bottom Layer w10: v1(1665,2160) 2302.35,2797.35 5672.65,2797.35 v1(5735,2735)
DGND: 
GND: "Input Button.2" "Mode Button.2" AMP1.2 AMP2.2 AMP3.2 AMP4.2 AMP5.2 AMP6.2 AMP7.2 AMP8.2 C1.1 C2.1 C3.1 C4.1 DS1.2 DS2.2 I1.2 I2.2 I3.2 I4.2 I5.2 I6.2 I7.2 I8.2 IC1.2 IP.2 MCU1.3 MCU1.5 MCU1.21 O1.2 O2.2 O3.2 O4.2 O5.2 O6.2 O7.2 pad.2 R21.1 R30.1 Reset.2 SD1.1@1110,1970 SD1.2@6764.06,3879.92 SD1.7@5520,2640.43 SD1.8 | length 7424.6
  Top Layer w10: v1(1045,2320) 1244.06,2320 IC1.2 ; v1(1105,2120) 1105,1975 SD1.1@1110,1970 ; DS1.2 v1(1160,3055) ; v1(1305,2660) 1383.46,2660 C4.1 C3.1 ; v1(1360,2735) 1364.21,2730.79 1490.6,2730.79 1535,2686.39 ; C4.1@1371.54,2675 C4.1@1376.54,2670 ; MCU1.5 1572.42,2629.25 1567.73,2633.94 1565,2633.94 1535,2663.93 1535,2686.39 ; MCU1.3 1540.86,2692.24 1535,2686.39 ; v1(1812.13,1985.51) 1812.13,2060 R30.1 ; MCU1.21 1967.58,2660.75 1972.27,2665.43 1975,2665.43 1995,2685.43 1995,2699.75 2026.3,2731.05 2068.05,2731.05 2095,2758 2120.59,2758 2130,2748.59 2166.41,2748.59 v1(2170,2745) ; v1(1945,1920) R21.1 ; C1.1 2067.56,2425.04 v1(2175,2425) v1(2175,2425) ; C2.1@2045,2668.46 2061.54,2685 v1(2125,2685) ; v1@2235,2680 DS2.2 ; v1(4520,3540) 4520,3464.79 4570,3414.79 AMP1.2 ; v1(4580,2340) 4620,2300 AMP2.2 ; v1(5255,3535) 5255,3454.79 5295,3414.79 AMP3.2 ; v1(5275,2335) 5325,2285 AMP4.2 ; SD1.7@5520,2640.43 SD1.8 5570.43,2640 v1(5685,2640) ; v1(5945,3535) 5995,3485 AMP5.2 ; v1(5980,2330) 6020,2290 AMP6.2 ; v1(6680,2330) 6720,2290 AMP8.2 ; v1(6685,3535) 6685,3449.79 6720,3414.79 AMP7.2
  Top Layer w55: v1(1900,1610) 1900,1543.2 1976.89,1466.31 IP.2 ; v1(2480,1650) 2484.07,1645.93 2484.07,1465.38 I1.2@2482.76,1464.07 ; v1(2565,3720) 2568.13,3723.13 2568.13,3878.99 O1.2 ; v1(2950,1740) 2950,1647.82 3008.76,1589.06 I2.2 ; O2.2 3265,3783.4 v1(3265,3725) ; v1(3430,1575) 3500.64,1575 I3.2 ; v1(3765,3565) 3767.9,3567.9 O3.2 ; I4.2 4212.51,1592.51 v1(4275,1655) ; O4.2 4502.28,3741.69 v1(4511.69,3741.69) ; v1(4765,1660) 4765,1647.82 4814.38,1598.44 I5.2 ; v1(4785,3750) 4836.82,3750 O5.2 ; v1(5340,1660) 5340,1647.82 5415.33,1572.5 5415.33,1465.93 I6.2 ; v1(5470,3665) 5540,3735 5540,3852.45 5566.16,3878.61 O6.2 ; v1(5935,1660) 5943.61,1651.39 5943.61,1540.83 6018.13,1466.31 I7.2 ; v1(6105,3700) 6165.58,3760.58 O7.2 ; v1(6460,1625) I8.2 ; v1(6715,3695) 6715,3829.01 6763.13,3877.14 6763.13,3878.99 SD1.2@6764.06,3879.92
  Bottom Layer w10: v1(2280,3220) 2285,3215 pad.2 ; Reset.2 2698.98,1970.39 2698.98,1876.02 v1(2700,1875) ; 3117.95,1971.42 3118.98,1970.39 3118.98,1876.02 v1(3120,1875) ; 3597.95,1971.42 3598.98,1970.39 3598.98,1871.02 v1(3600,1870)
  other v1: 2235,2660
INPUT_BUTTON: "Input Button.4" R11.2 | length 3252.1
  Top Layer w10: R11.2 v1(1525,3170) ; v1(3480,3010) 3480,2736.57 3505,2711.57 v1(3505,2705)
  Bottom Layer w10: v1(1525,3170) 1525,3235 1610,3235 1655,3280 3210,3280 v1(3480,3010) ; 3117.95,2148.58 3505,2535.63 v1(3505,2705)
Input_Power_1: AMP1.4 I1.1 R1.1 | length 3489.6
  Top Layer w10: R1.1 4305,3270 4316.38,3281.38 4338.08,3281.38 4343.08,3281.38 4353.08,3291.38 4363.08,3291.38 4373.08,3281.38 4385,3281.38 4526.09,3281.38 4532.6,3287.89 AMP1.4
  Top Layer w55: I1.1@2605,1464.83 v1(2605,1655) ; v1(4305,3015) R1.1
  Power w55: v1(2605,1655) 3055,1655 3155,1755 3678.64,1755 4479.5,2555.86 4479.5,2840.5 v1@4297.87,3022.13
Input_Power_2: AMP2.4 I2.1 R2.1 | length 2024.3
  Top Layer w10: R2.1 4325,2104.01 4330.86,2109.86 AMP2.4
  Top Layer w55: I2.1 3126.87,1571.87 v1(3215,1660) ; v1(4325,1820) R2.1
  Power w55: v1(3215,1660) 3558.11,1660 3645.61,1572.5 4077.5,1572.5 v1(4325,1820)
Input_Power_3: AMP3.4 I3.1 R3.1 | length 3038.6
  Top Layer w10: R3.1 5016.65,3284.14 5022.51,3290 5251.09,3290 5257.6,3296.51 AMP3.4
  Top Layer w55: I3.1 3728.75,1581.57 3795,1647.82 v1(3795,1660) ; v1(5006.59,3003.41) 5006.59,3164.8 R3.1
  Power w55: v1(3795,1660) 4347.5,2212.5 4851.14,2212.5 5184.5,2545.86 5184.5,2805.5 v1@4996.59,2993.41
Input_Power_4: AMP4.4 I4.1 R4.1 | length 1467.6
  Top Layer w10: R4.1 5028.3,2104.01 5034.15,2109.86 AMP4.4
  Top Layer w55: I4.1 4330.62,1577.42 4410,1656.8 v1(4410,1660) ; R4.1 5035,1978.22 v1(5035,1820)
  Power w55: v1(4410,1660) 4570,1820 v1(5035,1820)
Input_Power_5: AMP5.4 I5.1 SD1.1@5728.33,3174.88 | length 2516.3
  Top Layer w10: SD1.1@5728.33,3174.88 5734,3180.55 5734,3294.01 5739.86,3299.86 AMP5.4
  Top Layer w55: I5.1 4932.49,1562.49 v1(5030,1660) ; v1(5510,3165) 5514.94,3169.94 5723.39,3169.94 SD1.1@5728.33,3174.88
  Power w55: v1(5030,1660) 5038.61,1668.61 5088.61,1668.61 5505,2085 v1@5505,3145
Input_Power_6: AMP6.4 I6.1 R6.1 | length 976.7
  Top Layer w10: R6.1 5731.72,2104.01 5737.58,2109.86 AMP6.4
  Top Layer w55: I6.1 5534.36,1577.42 5605,1648.06 v1(5605,1660) ; R6.1 5735,1981.55 v1(5735,1825)
  Power w55: v1(5605,1660) 5735,1790 v1(5735,1825)
Input_Power_7: AMP7.4 I7.1 SD1.1@6440,3174.88 | length 2197.5
  Top Layer w10: SD1.1@6440,3174.88 6440,3289.91 6449.96,3299.86 AMP7.4
  Top Layer w55: I7.1 6136.24,1584.06 6200,1647.82 v1(6200,1660) ; v1(6440,3010) SD1.1@6440,3174.88
  Power w55: v1(6200,1660) 6200,2620 6440,2860 v1(6440,3010)
Input_Power_8: AMP8.4 I8.1 SD1.1@6435,1984.88 | length 1213
  Top Layer w10: SD1.1@6435,1984.88 6435,2104.01 6440.86,2109.86 AMP8.4
  Top Layer w55: v1(6430,1830) 6430,1979.88 SD1.1@6435,1984.88 ; I8.1 6738.11,1577.42 6810,1649.31 v1(6810,1660)
  Power w55: v1(6430,1830) 6430,1810 6580,1660 v1(6810,1660)
LCD_SS: pad.4 R21.2 R22.2 | length 2067.2
  Top Layer w10: R22.2 1815,2229.21 1923.43,2120.79 1923.43,2079.21 1937.13,2065.51 R21.2 1949.49,2070 v1(2080,2070) ; v1(2910,2737.35) 2912.5,2739.85 2912.5,3017.5 v1(2915,3020)
  Bottom Layer w10: v1(2080,2070) 2087.65,2077.65 2087.65,2097.65 2727.35,2737.35 v1(2910,2737.35) ; pad.4 2920,3087.2 2920,3025 v1(2915,3020)
MISO: R24.2 SD1.3@1310,1970 | length 1020.9
  Top Layer w10: SD1.3@1310,1970 v1(1310,2095) ; R24.2 1977.87,2284.49 1991.57,2270.79 1991.57,2250 2002.35,2239.23 2002.35,2212.65 v1(2010,2205)
  Bottom Layer w10: v1(1310,2095) 1311.57,2093.43 1350,2093.43 1388.43,2055 1460.15,2055 1480.15,2035 1529.85,2035 1549.85,2055 1860,2055 v1(2010,2205)
MODE_BUTTON: "Mode Button.4" R12.2 | length 3403.2
  Top Layer w10: R12.2 1360,3095.51 v1(1360,3190) ; v1(3610,3010) 3610,2736.57 3635,2711.57 v1(3635,2705)
  Bottom Layer w10: v1@1361.13,3190 1395,3190 1505,3300 3246.57,3300 3536.57,3010 v1(3610,3010) ; 3597.95,2148.58 3597.95,2667.95 v1(3635,2705)
MOSI: pad.5 R23.2 SD1.5@1510,1970 | length 2590.6
  Top Layer w10: v1(1505,2095) 1507.5,2092.5 1507.5,1972.5 SD1.5@1510,1970 ; R23.2 1895,2279.49 v1(1895,2220) ; v1(3065,2737.35) v1(3065,3025)
  Bottom Layer w10: v1(1505,2095) 1770,2095 2452.35,2777.35 3025,2777.35 v1(3065,2737.35) ; pad.5 3070,3075 3070,3030 v1(3065,3025)
MUX_COM_IO: R10.2 SD1.3@5320,2640.43 | length 3511.5
  Top Layer w10: R10.2 2240,2915 2514.57,2640.43 4950.38,2640.43 4993.93,2683.98 5286.85,2683.98 5296.81,2674.01 5296.81,2669.35 5302.67,2663.49 5313.19,2663.49 5320,2656.68 SD1.3@5320,2640.43
MUX_INH: R13.2 SD1.6@5470,2640.43 | length 4409.9
  Top Layer w10: R13.2 v1(1435,2985) ; v1(2225,2990) 2320,3085 3611.08,3085 3887.78,2808.31 5318.86,2808.31 5470,2657.17 SD1.6@5470,2640.43
  Bottom Layer w10: v1(1435,2985) 1437.5,2987.5 2222.5,2987.5 v1(2225,2990)
NetDS1_1: DS1.1 R32.1 | length 74.9
  Top Layer w10: R32.1 1160,2851.84 DS1.1
NetDS2_1: DS2.1 R31.1 | length 71.4
  Top Layer w10: R31.1 2188.2,2823.64 2205.97,2823.64 2231.06,2798.54 DS2.1
NetIC1_1: IC1.1 R26.2 | length 229.7
  Top Layer w10: IC1.1@1195,2374.06 1366.69,2374.06 1402.13,2409.49 R26.2
NetIC1_3: IC1.3 R40.1 | length 358.6
  Top Layer w10: IC1.3@1195,2255.94 1328.58,2255.94 1482.13,2409.49 R40.1
"NetInput Button_3": "Input Button.3" R14.2 | length 89.5
  Bottom Layer w10: R14.2 2861.02,2236.26 2861.02,2149.61 2862.05,2148.58
NetMCU1_1: MCU1.1 R12.1 | length 476.7
  Top Layer w10: R12.1 1447.08,3029.49 1505,2971.57 1505,2774.49 1527.87,2774.49 1547.13,2755.24 MCU1.1
NetMCU1_2: MCU1.2 R13.1 | length 192.8
  Top Layer w10: R13.1 1442.87,2784.49 1476.57,2750.79 1503.2,2750.79 1530.25,2723.74 MCU1.2
NetMCU1_7: MCU1.7 R26.1 | length 244
  Top Layer w10: R26.1 1416.3,2470.51 1430,2484.21 1430,2504.04 1435.86,2509.9 1513.33,2509.9 1549.29,2545.86 1565,2561.57 1567.73,2561.57 1572.42,2566.26 MCU1.7
NetMCU1_8: MCU1.8 R40.2 | length 139.3
  Top Layer w10: R40.2 1493.02,2473.53 1541.44,2473.53 1546.21,2478.29 MCU1.8
NetMCU1_9: MCU1.9 R16.1 | length 226.3
  Top Layer w10: R16.1 1513.7,2359.21 1524.14,2359.21 1530,2365.07 1530,2370 1616.1,2456.1 1653.47,2456.1 1659.76,2462.39 MCU1.9
NetMCU1_10: MCU1.10 R17.1 | length 180.8
  Top Layer w10: R17.1 1592.87,2345.51 1688.65,2441.29 1688.65,2475.07 MCU1.10
NetMCU1_11: MCU1.11 R19.1 | length 160.7
  Top Layer w10: R19.1 1672.87,2345.51 1722.76,2395.39 MCU1.11
NetMCU1_12: MCU1.12 R28.1 | length 138.4
  Top Layer w10: R28.1 1740.55,2345.51 1754.25,2359.21 MCU1.12
NetMCU1_14: MCU1.14 R22.1 | length 133.1
  Top Layer w10: R22.1 1817.24,2347.76 MCU1.14
NetMCU1_15: MCU1.15 R23.1 | length 149.3
  Top Layer w10: MCU1.15 1848.74,2416.26 1890,2375 R23.1
NetMCU1_16: MCU1.16 R24.1 | length 169.3
  Top Layer w10: MCU1.16 1880.24,2454.76 1961.65,2373.35 1961.65,2353.87 R24.1
NetMCU1_17: MCU1.17 R25.1 | length 241.5
  Top Layer w10: MCU1.17 1952.61,2534.76 1958.9,2528.47 1958.9,2441.1 2024,2376 2035.79,2376 2045.9,2365.89 R25.1@2045.9,2354.1
NetMCU1_23: MCU1.23 R9.1 | length 124.2
  Top Layer w10: MCU1.23 1990.46,2723.74 1996.72,2730 1996.97,2730 2018.43,2751.46 2018.43,2755.79 2032.13,2769.49 R9.1
NetMCU1_25: MCU1.25 R10.1 | length 114.8
  Top Layer w10: MCU1.25 1880.24,2877.87 1909.49,2907.13 R10.1
NetMCU1_29: MCU1.29 R27.1 | length 218.9
  Top Layer w10: R27.1@1650,3027.48 1650,2950 1750,2850
NetMCU1_32: MCU1.32 R11.1 | length 270
  Top Layer w10: R11.1@1530,3028.53 1530,2999.49 1625,2904.49 1625,2870.79 1659.76,2836.02 MCU1.32
"NetMode Button_3": "Mode Button.3" R15.2 | length 84.9
  Bottom Layer w10: 3342.05,2148.58 3343.52,2150.06 3343.52,2230.81 R15.2
NetR29_2: R29.2 Reset.3 | length 135.7
  Bottom Layer w10: Reset.3@2437.05,2158.58 2438.52,2160.06 2438.52,2228.52 2447.28,2237.28 R29.2
Output_1_Power: AMP1.3 O1.1 R1.2 | length 2668.2
  Top Layer w10: R1.2 4305,3414.8 4310.86,3408.94 4526.09,3408.94 4532.6,3402.43 AMP1.3
  Top Layer w55: R1.2 4305.19,3535.31 v1(4305.19,3680.42)
  Power w55: O1.1 2524.47,3953.44 2740.39,3953.44 2933.5,4146.56 3270.28,4146.56 3736.41,3680.42 v1(4305.19,3680.42)
Output_2_Power: AMP2.3 O2.1 R2.2 | length 2457.8
  Top Layer w10: R2.2 4325,2221.72 4330.86,2215.86 4576.09,2215.86 4582.6,2209.34 AMP2.3
  Top Layer w55: R2.2 v1(4325,2535)
  Power w55: O2.1 3050.98,3879.31 3050.98,3809.02 v1(4325,2535)
Output_3_Power: AMP3.3 O3.1 R3.2 | length 2344.5
  Top Layer w10: R3.2 5020,3531.78 5020,3414.8 5025.86,3408.94 5251.09,3408.94 5257.6,3402.43 AMP3.3
  Top Layer w55: R3.2 5054.07,3535.12 5183.95,3665 v1(5190,3665)
  Power w55: O3.1 3717.21,3812.5 3987.17,3812.5 4122.02,3947.34 4421.85,3947.34 4704.2,3665 v1(5190,3665)
Output_4_Power: AMP4.3 O4.1 R4.2 | length 2270.3
  Top Layer w10: R4.2 5028.33,2224.8 5034.19,2218.94 5281.09,2218.94 5287.6,2212.43 AMP4.3
  Top Layer w55: R4.2 5030,2346.78 v1(5030,2525)
  Power w55: O4.1 4248.37,3877.5 4271.13,3877.5 4695,3453.63 4695,2860 v1(5030,2525)
Output_5_Power: AMP5.3 O5.1 SD1.2@5728.33,3535.12 | length 1486.4
  Top Layer w10: SD1.2@5728.33,3535.12 5728.33,3420.86 5734.19,3415 5951.09,3415 5957.6,3408.49 AMP5.3
  Top Layer w55: SD1.2@5728.33,3535.12 5735,3541.78 v1(5735,3685)
  Power w55: O5.1 4958.55,3770 5488.81,3770 5511.31,3747.5 5672.5,3747.5 v1(5735,3685)
Output_6_Power: AMP6.3 O6.1 R6.2 | length 2642
  Top Layer w10: R6.2 5731.67,2220.86 5737.52,2215 AMP6.3@5970.84,2215
  Top Layer w55: v1(5599.5,2405) 5610.79,2393.71 5683.07,2393.71 R6.2
  Power w55: O6.1 5492.97,3835 5515.73,3835 5538.23,3812.5 5872.5,3812.5 6045,3640 6045,2850.5 v1@5597.13,2402.63
Output_7_Power: AMP7.3 O7.1 SD1.2@6440,3535.12 | length 1049.3
  Top Layer w10: SD1.2@6440,3535.12 6440,3415.86 6445.86,3410 6676.09,3410 6682.6,3403.49 AMP7.3
  Top Layer w55: SD1.2@6440,3535.12 v1(6440,3699.68)
  Power w55: O7.1 6273,3654.39 6323.75,3654.39 6357.75,3688.39 6428.71,3688.39 v1(6440,3699.68)
Output_8_Power: AMP8.3 SD1.1@6645.94,3879.92 SD1.2@6435,2345.12 | length 2151.1
  Top Layer w10: SD1.2@6435,2345.12 6425,2335.12 6425,2224.8 6430.86,2218.94 6676.09,2218.94 6682.6,2212.43 AMP8.3
  Top Layer w55: SD1.2@6435,2345.12 v1(6435,2448)
  Power w55: v1@6432.05,2447.05 6800,2815 6800,3725.87 SD1.1@6645.94,3879.92
PASSTHROUGH_1: 
RESET_BUTTON: R27.2 Reset.4 | length 3265.1
  Top Layer w10: R27.2 v1(1645,3165) ; v1(3360,3010) 3360,2736.57 3385,2711.57 v1(3385,2705)
  Bottom Layer w10: v1(1645,3165) 1650,3170 1650,3230 1825,3230 1855,3260 3111.08,3260 3360,3011.08 v1(3360,3010) ; Reset.4 2697.95,2257.95 2935,2495 3175,2495 v1(3385,2705)
SCK: pad.6 R25.2 SD1.4@1410,1970 | length 3674.4
  Top Layer w10: v1(1405,2095) 1407.5,2092.5 1407.5,1972.5 SD1.4@1410,1970 ; R25.2 2115.51,2350 v1(2220,2350) ; v1(3240,2705) v1(3240,3030)
  Bottom Layer w10: v1(1405,2095) 1448.43,2095 1488.43,2055 1521.57,2055 1541.57,2075 1806.57,2075 1940,2208.43 1940,2216.57 2023.43,2300 2179.14,2300 v1@2220,2340.86 ; v1(2220,2350) v1@2220,2340.86 ; pad.6 3127.8,3215 3245,3097.8 3245,3035 v1(3240,3030) ; v1(3240,2705) 3232.35,2697.35 2812.35,2697.35 2145,2030 2063.43,2030 2040,2053.43 2040,2106.3 2220,2286.3 v1@2220,2340.86
SCL_B1B2: "I2C A.2" "I2C B.2" MCU1.28 R18.1 | length 1610.5
  Top Layer w10: 1483.11,3880 1488.32,3874.79 1488.32,3841.68 1725,3605 1725,3602.87 ; MCU1.28 1785.75,3248.15 1732.87,3301.02 R18.1 1725,3602.87 ; 2023.11,3880 2013.57,3870.46 1992.6,3870.46 1725,3602.87
SD_SS: R28.2 R30.2 SD1.6@1610,1970 | length 488.2
  Top Layer w10: SD1.6@1610,1970 1610,2020 1656.16,2066.16 1656.52,2066.16 1716.39,2126.02 R30.2@1809.25,2126.02 ; R28.2 1740,2195.28 R30.2@1809.25,2126.02 ; R30.2 R30.2@1809.25,2126.02
SDA_B1B2: "I2C A.1" "I2C B.1" MCU1.27 R20.1 | length 2162.3
  Top Layer w10: 1365,3880 1429.11,3880 1432.33,3880 1438.19,3885.86 1439.69,3891.52 cw(c1483.11,3880) 1527.76,3875.05 1527.76,3870.38 1608.14,3790 1856.72,3790 1907.65,3840.94 1907.65,3877.35 1905,3880 1946.72,3880 ; MCU1.27 1817.24,3260.63 1857.13,3300.51 R20.1 1872.87,3300.51 2068.03,3495.67 2068.03,3898.61 2041.72,3924.92 1991.64,3924.92 1946.72,3880 ; 1888.21,3863.21 1925.86,3863.21 1929.92,3863.21 1929.92,3880 1946.72,3880
TEST_LED: R9.2 R31.2 | length 78.4
  Top Layer w10: R9.2 2113.89,2830.51 R31.2
pads on no net: "I2C A.3" "I2C B.3" "Input Button.1" "Mode Button.1" I1.3 I2.3 I3.3 I4.3 I5.3 I6.3 I7.3 I8.3 IP.3 MCU1.13 MCU1.19 MCU1.22 MCU1.24 MCU1.26 MCU1.30 MCU1.31 O1.3 O2.3 O3.3 O4.3 O5.3 O6.3 O7.3 Reset.1 SD1.2@1210,1970 SD1.3@6705,4050

## Polygon pours and split planes (outlines as drawn)
+5V on Power "+5V_L03_P001" (solid, pour order 1): 1000,4345 7000,4345 7000,1000 1000,1000
GND on Ground "GND_L02_P000" (solid, pour order 0): 1000,4345 7000,4345 7000,1000 1000,1000

## Silkscreen, mask and mechanical layers (free items; w line width, h text height)
Top Overlay:
  region: 1158.44,1679.19
  region: 1134.28,1787
  region: 1126.42,1779.32
  region: 1171.38,1647.79
  region: 1086.24,1703.29
  region: 1093.96,1659.45
  region: 1151.78,1619.49
  text "O2" at 2872.84,4052.84 h30 r90
  text "O1" at 2270,4050 h30 r90
  text "O8" at 6465,4045 h30 r90
  text "O3" at 3472.84,4042.84 h30 r90
  text "I2C B" at 1721.81,4042.4 h30 r90
  text "O4" at 4065.78,4042.35 h30 r90
  text "O5" at 4670.78,4042.35 h30 r90
  text "O6" at 5270.78,4042.35 h30 r90
  text "O7" at 5870.78,4042.35 h30 r90
  text "I2C A" at 1180,4040 h30 r90
  text "R3" at 4777.1,3332.51 h30
  text "R5" at 5471.81,3330.97 h30
  text "SDA PU" at 1913.23,3328.22 h30 r270
  text "R1" at 4056.78,3313.23 h30
  text "R7" at 6205,3310 h30
  text "SCL PU" at 1686.77,3236.78 h30 r90
  text "Power LED" at 1101.77,2756.78 h30 r90
  text "SC" at 1355,2510 h25
  text "Osc." at 1175,2435 h30
  text "R8" at 6186.42,2118.8 h30
  text "R2" at 4096.78,2103.23 h30
  text "R4" at 4791.13,2099.83 h30
  text "R6" at 5496.42,2098.8 h30
  text "5V" at 1680,2030 h25
  text "MISO" at 1255,1880 h25
  text "SCK" at 1370,1880 h25
  text "MOSI" at 1465,1880 h25
  text "SS" at 1575,1880 h25
  text "GND" at 1075,1875 h25
  text "Power" at 1955,1000 h30
  text "I1" at 2505,1000 h30
  text "I2" at 3030,1000 h30
  text "I3" at 3630,1000 h30
  text "I4" at 4240,1000 h30
  text "I5" at 4845,1000 h30
  text "I6" at 5445,1000 h30
  text "I7" at 6045,1000 h30
  text "I8" at 6650,1000 h30
Bottom Overlay:
  drawing of 43 lines, arcs and shapes, not listed
  text "GND" at 2435,3310 h30
  text "SS" at 2745,3310 h30
  text "5V" at 2575,3305 h30
  text "MOSI" at 2870,3305 h30
  text "SCK" at 3026.72,3304.78 h30
  text "Mode" at 3555,1850 h60
  text "Reset" at 2655,1845 h60
  text "Input" at 3075,1830 h60
  text "CUAIR / Current Logging Board / 2025 / Jacob Faucett" at 1755,1075 h30